# Altium PCB Pcb.PcbDoc
Units mm, origin at the board's own origin, x right, y up, seen from the top; angles counter-clockwise.
Board outline 80.64 x 139.06 mm, 2 copper layers (Top Layer, Bottom Layer); 11 components, 25 nets, 136 pads, 1 vias.
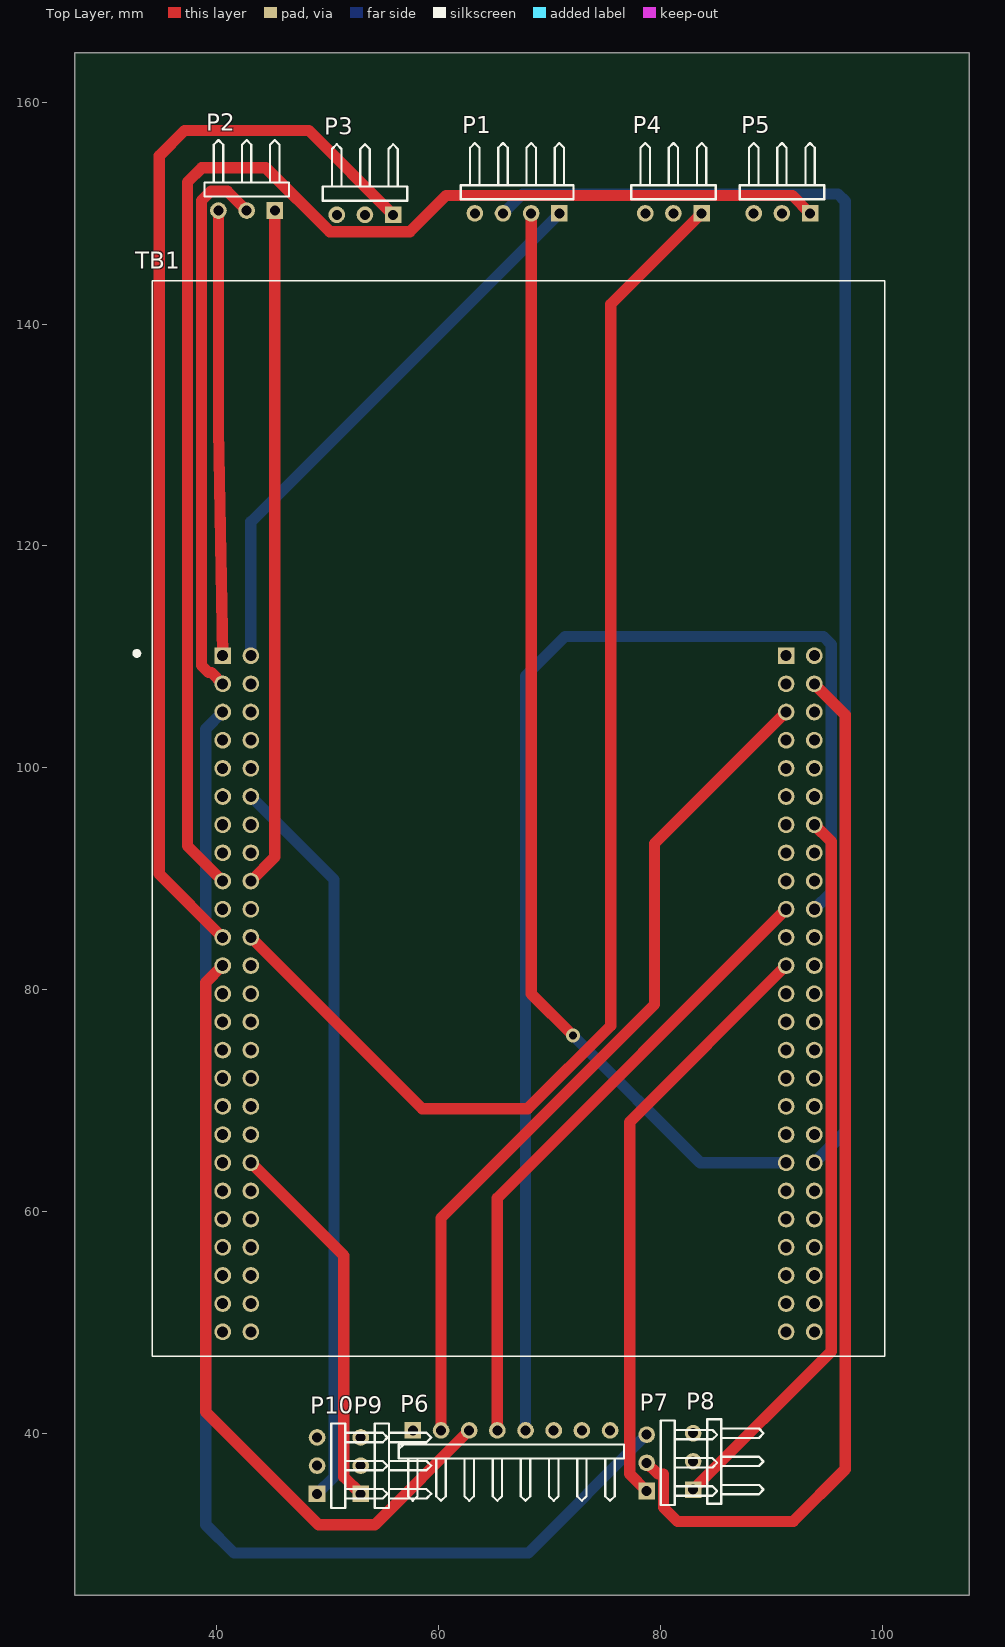
[diagram p0: Top Layer view]
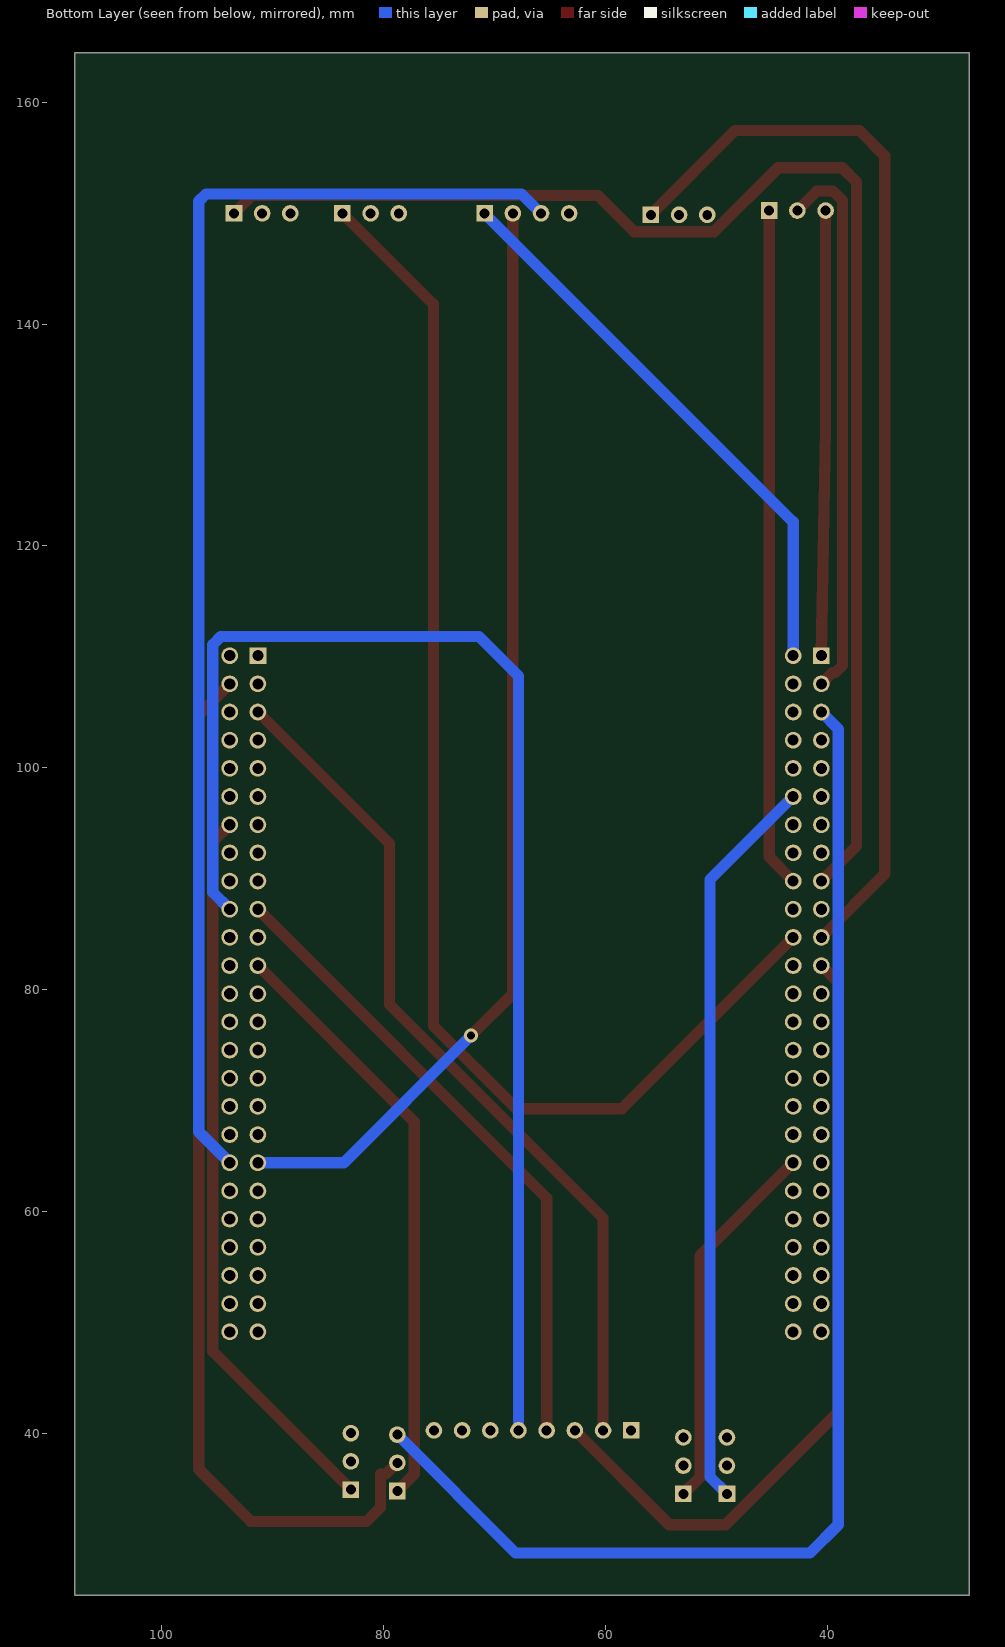
[diagram p1: Bottom Layer view, seen from below]

## Layer stack, top to bottom
Top Solder: solder mask 0.0102, Solder Resist, Dk 3.5
Top Layer: signal copper 0.0356
Dielectric 1: dielectric 0.32, FR-4, Dk 4.8
Bottom Layer: signal copper 0.0356
Bottom Solder: solder mask 0.0102, Solder Resist, Dk 3.5

## Board outline
27.178,25.4 107.823,25.4 107.823,164.465 27.178,164.465

## Design rules (kind name [scope] priority, off if disabled: settings)
Clearance [All] p1: gap=0.254 ignorepadtopadclearanceinfootprint=FALSE
PolygonConnect [All] p1: connectstyle=Relief reliefconductorwidth=0.254 reliefentries=4 polygonreliefangle="90 Angle" airgapwidth=0.254
RoomDefinition Sch [InComponentClass('Sch')] p1: confinementstyle=ConfineIn formatcopy=TRUE lockcomponents=FALSE outline 178.943,26.797 337.185,26.797 337.185,127.381 178.943,127.381
RoutingVias [All] p1: holewidth=0.711 width=1.27 viastyle="Through Hole" minholewidth=0.711 minwidth=1.27 maxholewidth=0.711 maxwidth=1.27
SolderMaskExpansion [All] p1: expansion=0.102
Width [All] p1: maxlimit=1.016 minlimit=1.016 preferedwidth=1.016
30 further rules are at their usual default settings.

## Components (designator, comment, footprint, x,y, rotation, side; value= is the part's Value field where it differs from the comment)
P1 "Header 4H" HDR1X4H 70.866,149.987 r180 top
P2 "Header 3H" HDR1X3H 45.212,150.241 r180 top
P3 "Header 3H" HDR1X3H 55.88,149.86 r180 top
P4 "Header 3H" HDR1X3H 83.693,149.987 r180 top
P5 "Header 3H" HDR1X3H 93.472,149.987 r180 top
P6 "Header 8H" HDR1X8H 57.658,40.259 r0 top
P7 "Header 3H" HDR1X3H 78.74,34.798 r90 top
P8 "Header 3H" HDR1X3H 82.931,34.925 r90 top
P9 "Header 3H" HDR1X3H 52.959,34.544 r90 top
P10 "Header 3H" HDR1X3H 49.022,34.544 r90 top
TB1 "STM32F4DISCOVERY" *MODULE_STM32F4DISCOVERY_STM32F4DISCOVERY(Primary) 67.183,95.429 r0 top

## Footprints (in the part's own frame and the unit in brackets; to place one, negate y for a bottom-side part, rotate by r counter-clockwise, add the part's x,y. Pads: shape width x height; smd on the part's side, far side on the other; paste and mask are expansions set on the pad)
*MODULE_STM32F4DISCOVERY_STM32F4DISCOVERY(Primary) [mm]
  rect 1.508x1.508 hole 1: P1_1(-26.67,14.68) P2_1(24.13,14.68)
  round 1.508 hole 1: P1_2(-24.13,14.68) P1_3(-26.67,12.14) P1_4(-24.13,12.14) P1_5(-26.67,9.6) P1_6(-24.13,9.6) P1_7(-26.67,7.06) P1_8(-24.13,7.06) P1_9(-26.67,4.52) P1_10(-24.13,4.52) P1_11(-26.67,1.98) P1_12(-24.13,1.98) P1_13(-26.67,-0.56) P1_14(-24.13,-0.56) P1_15(-26.67,-3.1) P1_16(-24.13,-3.1) P1_17(-26.67,-5.64) P1_18(-24.13,-5.64) P1_19(-26.67,-8.18) P1_20(-24.13,-8.18) P1_21(-26.67,-10.72) P1_22(-24.13,-10.72) P1_23(-26.67,-13.26) P1_24(-24.13,-13.26) P1_25(-26.67,-15.8) P1_26(-24.13,-15.8) P1_27(-26.67,-18.34) P1_28(-24.13,-18.34) P1_29(-26.67,-20.88) P1_30(-24.13,-20.88) P1_31(-26.67,-23.42) P1_32(-24.13,-23.42) P1_33(-26.67,-25.96) P1_34(-24.13,-25.96) P1_35(-26.67,-28.5) P1_36(-24.13,-28.5) P1_37(-26.67,-31.04) P1_38(-24.13,-31.04) P1_39(-26.67,-33.58) P1_40(-24.13,-33.58) P1_41(-26.67,-36.12) P1_42(-24.13,-36.12) P1_43(-26.67,-38.66) P1_44(-24.13,-38.66) P1_45(-26.67,-41.2) P1_46(-24.13,-41.2) P1_47(-26.67,-43.74) P1_48(-24.13,-43.74) P1_49(-26.67,-46.28) P1_50(-24.13,-46.28) P2_2(26.67,14.68) P2_3(24.13,12.14) P2_4(26.67,12.14) P2_5(24.13,9.6) P2_6(26.67,9.6) P2_7(24.13,7.06) P2_8(26.67,7.06) P2_9(24.13,4.52) P2_10(26.67,4.52) P2_11(24.13,1.98) P2_12(26.67,1.98) P2_13(24.13,-0.56) P2_14(26.67,-0.56) P2_15(24.13,-3.1) P2_16(26.67,-3.1) P2_17(24.13,-5.64) P2_18(26.67,-5.64) P2_19(24.13,-8.18) P2_20(26.67,-8.18) P2_21(24.13,-10.72) P2_22(26.67,-10.72) P2_23(24.13,-13.26) P2_24(26.67,-13.26) P2_25(24.13,-15.8) P2_26(26.67,-15.8) P2_27(24.13,-18.34) P2_28(26.67,-18.34) P2_29(24.13,-20.88) P2_30(26.67,-20.88) P2_31(24.13,-23.42) P2_32(26.67,-23.42) P2_33(24.13,-25.96) P2_34(26.67,-25.96) P2_35(24.13,-28.5) P2_36(26.67,-28.5) P2_37(24.13,-31.04) P2_38(26.67,-31.04) P2_39(24.13,-33.58) P2_40(26.67,-33.58) P2_41(24.13,-36.12) P2_42(26.67,-36.12) P2_43(24.13,-38.66) P2_44(26.67,-38.66) P2_45(24.13,-41.2) P2_46(26.67,-41.2) P2_47(24.13,-43.74) P2_48(26.67,-43.74) P2_49(24.13,-46.28) P2_50(26.67,-46.28)
  silkscreen extent -34.61,-48.5 33,48.5
HDR1X3H [mm] "Connector; Header; 3 Position; Right Angle"
  rect 1.5x1.5 hole 0.9: 1(0,0)
  round 1.5 hole 0.9: 2(2.54,0) 3(5.08,0)
  silkscreen extent -1.27,-6.35 6.35,-1.27
HDR1X4H [mm] "Connector; Header; 4 Position; Right Angle"
  rect 1.5x1.5 hole 0.9: 1(0,0)
  round 1.5 hole 0.9: 2(2.54,0) 3(5.08,0) 4(7.62,0)
  silkscreen extent -1.27,-6.35 8.89,-1.27
HDR1X8H [mm] "Connector; Header; 8 Position; Right Angle"
  rect 1.5x1.5 hole 0.9: 1(0,0)
  round 1.5 hole 0.9: 2(2.54,0) 3(5.08,0) 4(7.62,0) 5(10.16,0) 6(12.7,0) 7(15.24,0) 8(17.78,0)
  silkscreen extent -1.27,-6.35 19.05,-1.27

## Part data
P1: "Header, 4-Pin, Right Angle", LatestRevisionDate=17-Jul-2002, LatestRevisionNote="Re-released for DXP Platform.", Publisher="Altium Limited"
P2 P3 P4 P5 P7 P8 P9 P10: "Header, 3-Pin, Right Angle", LatestRevisionDate=17-Jul-2002, LatestRevisionNote="Re-released for DXP Platform.", Publisher="Altium Limited"
P6: "Header, 8-Pin, Right Angle", LatestRevisionDate=17-Jul-2002, LatestRevisionNote="Re-released for DXP Platform.", Publisher="Altium Limited"
TB1: "STM32F407VGT6 Discovery STM32F4 ARM® Cortex®-M4 MCU 32-Bit Embedded Evaluation Board", Package=None, Availability=Unavailable, MF=STMicroelectronics, MP=STM32F4DISCOVERY, Price=None, SnapEDA_Link=https://www.snapeda.com/parts/STM32F4DISCOVERY/STMicroelectronics/view-part/46335/?ref=snap

## Via types
v1: diameter 1.27, hole 0.711, Top Layer to Bottom Layer, 1 vias

## Nets (pads, with @x,y where several pads share a name; then routed paths per layer and width w, separated by ;. In a path a pad name is that pad's centre, name@x,y a point inside that pad or via, vN(x,y) a via of type N, cw(c..) or ccw(c..) an arc to the next point about the centre after c; other vN are vias at no path point)
3.3V_GY85: P6.2 TB1.P2_5 | length 77.7
  Top Layer w1.016: P6.2 60.198,59.411 79.451,78.664 79.451,93.167 TB1.P2_5
5V-UART: P1.4
5V_MC6C: P7.2 TB1.P2_4 | length 95.8
  Top Layer w1.016: P7.2 79.756,36.322 80.264,36.322 80.264,33.325 81.534,32.055 91.948,32.055 96.647,36.754 96.647,104.775 TB1.P2_4
5V_UART: TB1.P2_3
A_GY85: P6.7
G_GY85: P6.8
GND_GY85: P6.3 TB1.P1_23 | length 72.4
  Top Layer w1.016: TB1.P1_23 38.989,80.645 38.989,41.91 49.149,31.75 54.229,31.75 P6.3
GND_MC6C: P7.3 TB1.P1_5 | length 119.1
  Bottom Layer w1.016: TB1.P1_5 38.989,103.505 38.989,31.75 41.529,29.21 68.072,29.21 P7.3
GND_Supply: P2.3 TB1.P1_1 | length 40.1
  Top Layer w1.016: P2.3 40.132,130.556 TB1.P1_1
GND_UART: P1.1 TB1.P1_2 | length 51.4
  Bottom Layer w1.016: TB1.P1_2 43.053,122.174 P1.1
M_GY85: P6.6
RX: P1.2 TB1.P2_37 | length 99.7
  Top Layer w1.016: P1.2 68.326,79.629 v1(72.085,75.87)
  Bottom Layer w1.016: v1(72.085,75.87) 83.566,64.389 TB1.P2_37
SCL_GY85: P6.4 TB1.P2_19 | length 57.8
  Top Layer w1.016: P6.4 65.278,61.214 TB1.P2_19
SDA_GY85: P6.5 TB1.P2_20 | length 121.9
  Bottom Layer w1.016: P6.5 67.818,108.28 71.374,111.836 94.666,111.836 95.377,111.125 95.377,88.773 TB1.P2_20
Signal1_ESC: P2.1 TB1.P1_18 | length 61.3
  Top Layer w1.016: TB1.P1_18 45.212,91.948 P2.1
Signal1_MC6C: P7.1 TB1.P2_23 | length 53.8
  Top Layer w1.016: P7.1 77.216,36.322 77.216,68.072 TB1.P2_23
Signal2_ESC: P3.1 TB1.P1_21 | length 98
  Top Layer w1.016: TB1.P1_21 34.798,90.424 34.798,155.169 37.084,157.455 48.285,157.455 P3.1
Signal2_MC6C: P8.1 TB1.P2_14 | length 65.7
  Top Layer w1.016: P8.1 95.377,47.371 95.377,93.345 TB1.P2_14
Signal3_ESC: P4.1 TB1.P1_22 | length 118.6
  Top Layer w1.016: TB1.P1_22 58.496,69.266 68.021,69.266 75.489,76.733 75.489,141.783 P4.1
Signal3_MC6C: P9.1 TB1.P1_38 | length 33.9
  Top Layer w1.016: TB1.P1_38 51.435,56.007 51.435,36.068 P9.1
Signal4_ESC: P5.1 TB1.P1_17 | length 125.4
  Top Layer w1.016: TB1.P1_17 37.338,92.964 37.338,152.806 38.633,154.102 44.399,154.102 50.165,148.336 57.404,148.336 60.655,151.587 91.872,151.587 P5.1
Signal4_MC6C: P10.1 TB1.P1_12 | length 66.6
  Bottom Layer w1.016: TB1.P1_12 50.546,89.916 50.546,36.068 P10.1
TX: P1.3 TB1.P2_38 | length 119.7
  Bottom Layer w1.016: P1.3 67.539,151.74 95.987,151.74 96.647,151.079 96.647,67.183 TB1.P2_38
VCC_IN: P6.1
VDD_Supply: P2.2 TB1.P1_3 | length 49.6
  Top Layer w1.016: TB1.P1_3 39.497,108.585 39.243,108.585 38.608,109.22 38.608,151.13 39.472,151.994 40.919,151.994 P2.2
pads on no net: P3.2 P3.3 P4.2 P4.3 P5.2 P5.3 P8.2 P8.3 P9.2 P9.3 P10.2 P10.3 TB1.P1_4 TB1.P1_6 TB1.P1_7 TB1.P1_8 TB1.P1_9 TB1.P1_10 TB1.P1_11 TB1.P1_13 TB1.P1_14 TB1.P1_15 TB1.P1_16 TB1.P1_19 TB1.P1_20 TB1.P1_24 TB1.P1_25 TB1.P1_26 TB1.P1_27 TB1.P1_28 TB1.P1_29 TB1.P1_30 TB1.P1_31 TB1.P1_32 TB1.P1_33 TB1.P1_34 TB1.P1_35 TB1.P1_36 TB1.P1_37 TB1.P1_39 TB1.P1_40 TB1.P1_41 TB1.P1_42 TB1.P1_43 TB1.P1_44 TB1.P1_45 TB1.P1_46 TB1.P1_47 TB1.P1_48 TB1.P1_49 TB1.P1_50 TB1.P2_1 TB1.P2_2 TB1.P2_6 TB1.P2_7 TB1.P2_8 TB1.P2_9 TB1.P2_10 TB1.P2_11 TB1.P2_12 TB1.P2_13 TB1.P2_15 TB1.P2_16 TB1.P2_17 TB1.P2_18 TB1.P2_21 TB1.P2_22 TB1.P2_24 TB1.P2_25 TB1.P2_26 TB1.P2_27 TB1.P2_28 TB1.P2_29 TB1.P2_30 TB1.P2_31 TB1.P2_32 TB1.P2_33 TB1.P2_34 TB1.P2_35 TB1.P2_36 TB1.P2_39 TB1.P2_40 TB1.P2_41 TB1.P2_42 TB1.P2_43 TB1.P2_44 TB1.P2_45 TB1.P2_46 TB1.P2_47 TB1.P2_48 TB1.P2_49 TB1.P2_50

## Other copper
Bottom Layer:
  region: 70.993,150.114